# Altium PCB Breakout_board_v3.PcbDoc
Units mm, origin at the board's own origin, x right, y up, seen from the top; angles counter-clockwise.
Board outline 90.2 x 95.9 mm, 2 copper layers (Top Layer, Bottom Layer); 25 components, 88 nets, 209 pads, 79 vias.
Unrouted connection lines stored in the file: 5.
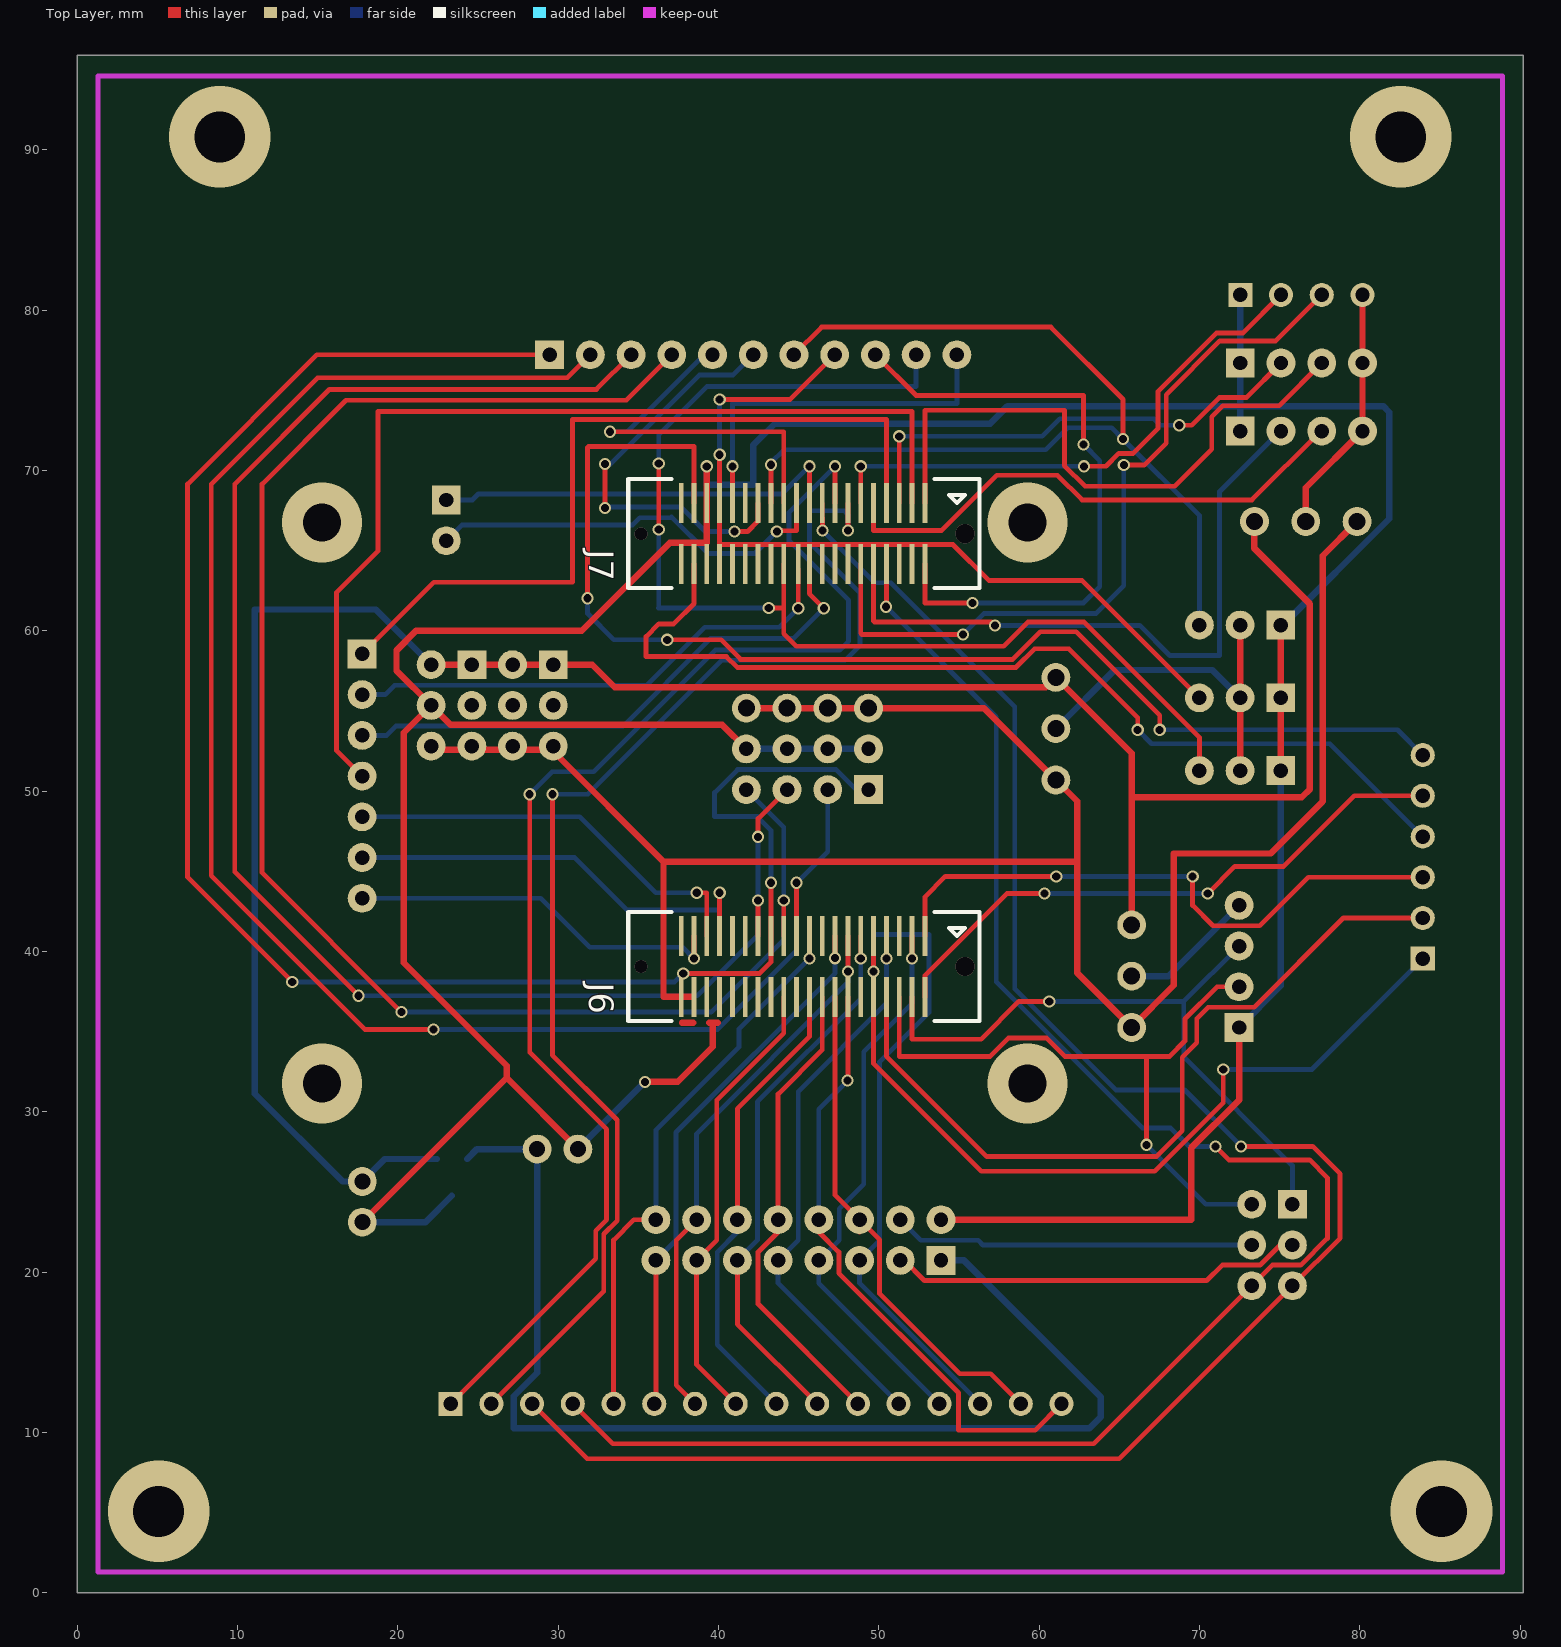
[diagram p0: Top Layer view]
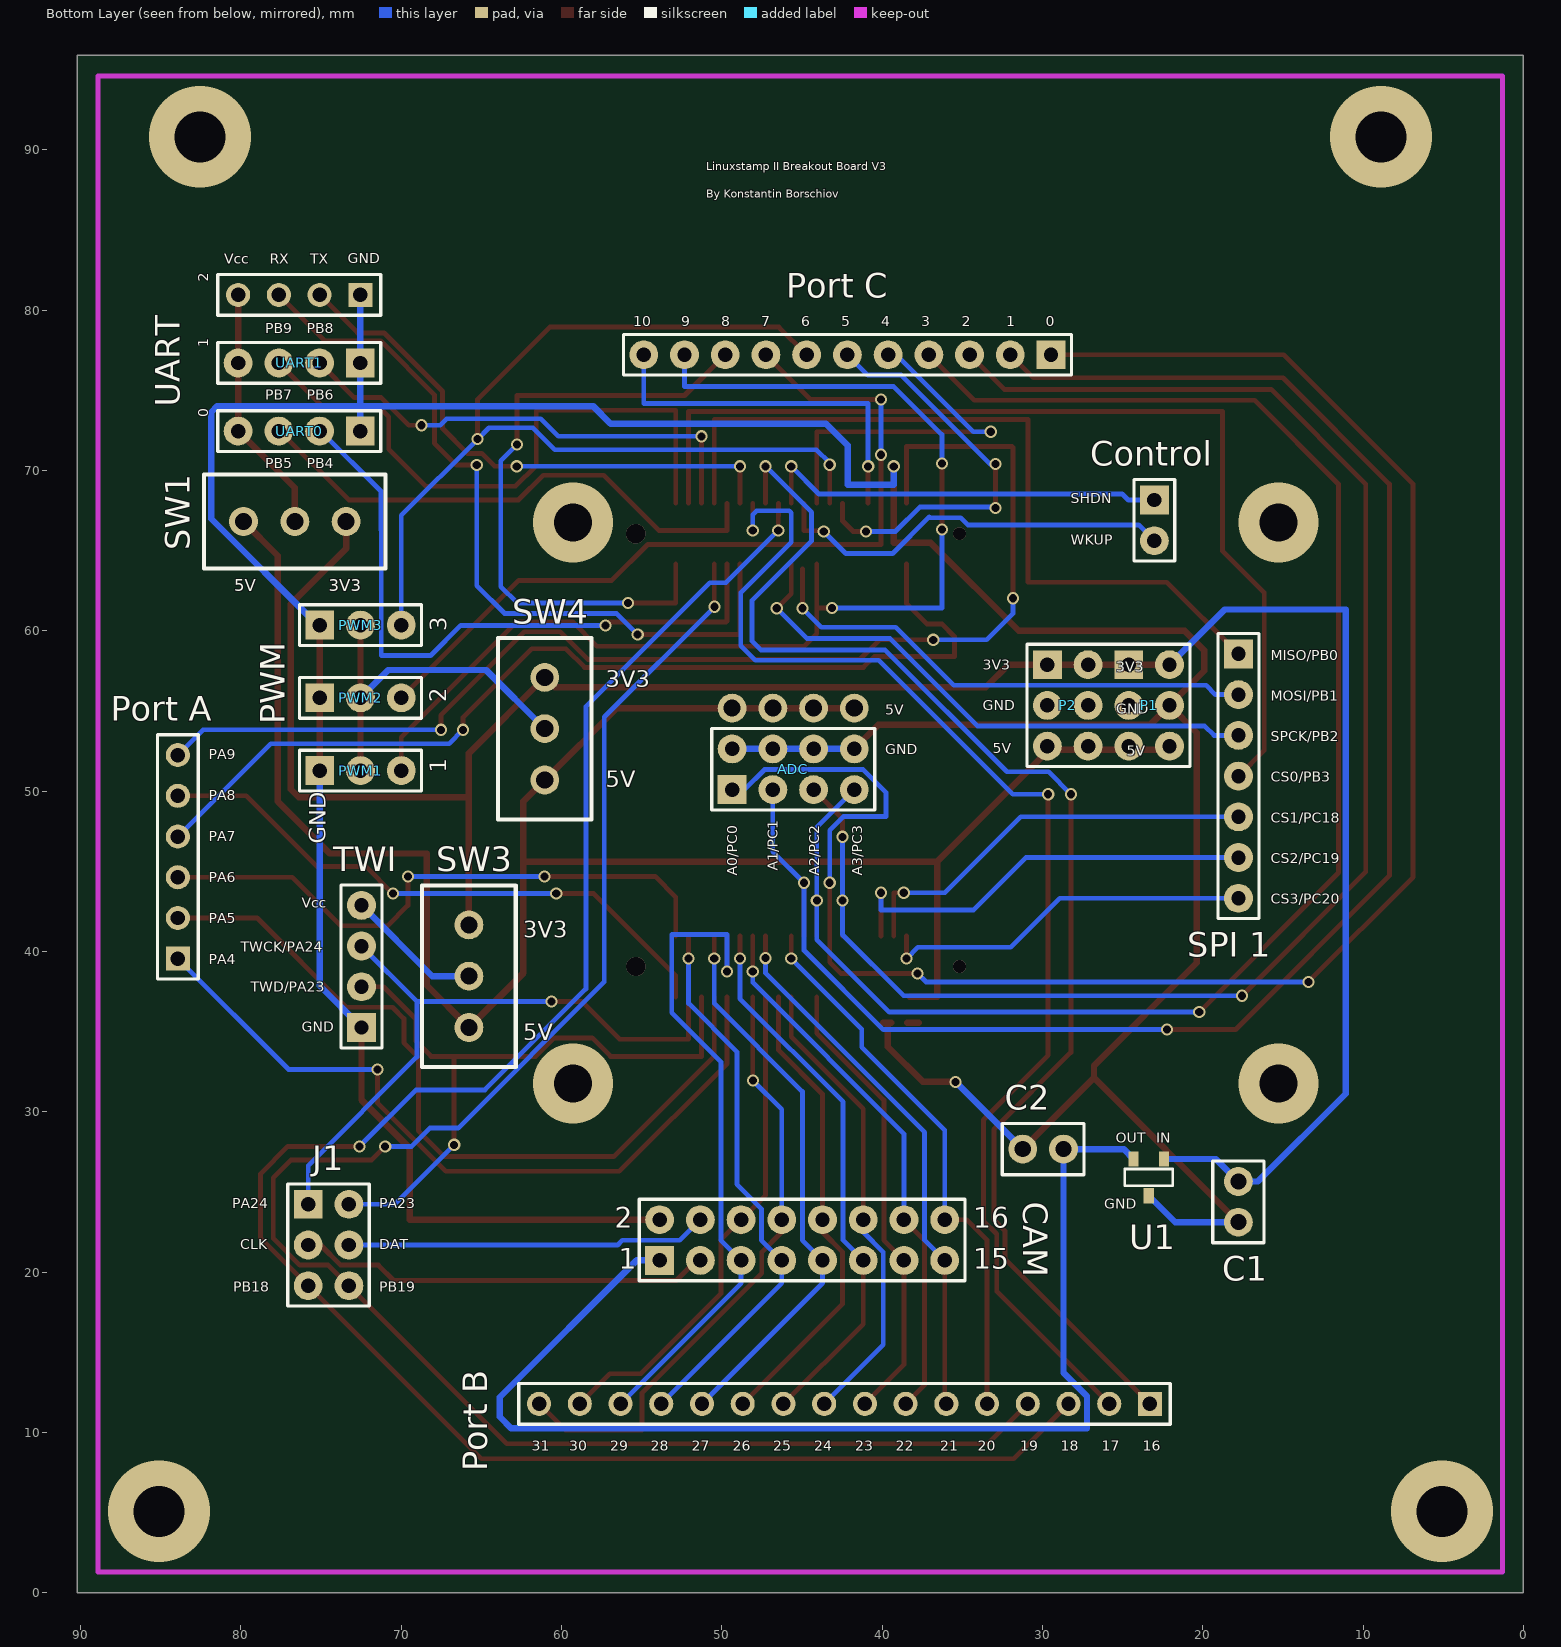
[diagram p1: Bottom Layer view, seen from below]

## Layer stack, top to bottom
Top Layer: signal copper 0.0356
Dielectric: dielectric 0.32, FR-4, Dk 4.8
Bottom Layer: signal copper 0.0356

## Board outline
0,0 90.2,0 90.2,95.9 0,95.9

## Design rules (kind name [scope] priority, off if disabled: settings)
Clearance [All] p1: gap=0.203
PolygonConnect [All] p1: connectstyle=Relief reliefconductorwidth=0.254 reliefentries=4 polygonreliefangle="90 Angle"
RoutingVias RoutingVias_1 [InNetClass('Rail')] p1: holewidth=3.18 width=6.35 viastyle="Through Hole" minholewidth=3.18 minwidth=6.35 maxholewidth=3.18 maxwidth=6.35
RoutingVias RoutingVias_2 [All] p2: holewidth=0.508 width=0.762 viastyle="Through Hole" minholewidth=0.508 minwidth=0.762 maxholewidth=1.27 maxwidth=1.27
RoutingVias [All] p3: holewidth=0.8 width=1.6 viastyle="Through Hole" minholewidth=0.711 minwidth=1.27 maxholewidth=0.711 maxwidth=1.27
SilkscreenOverComponentPads [All] p1: minsilkscreentomaskgap=0.25
SolderMaskExpansion [All] p1: expansion=0.102
Width Width_1 [InNetClass('Power')] p1: maxlimit=0.4 minlimit=0.4 preferedwidth=0.4 minimp=50.000000 maximp=50.000000 favimp=50.000000
Width [All] p2: maxlimit=0.3 minlimit=0.3 preferedwidth=0.3
27 further rules are at their usual default settings.

## Classes and differential pairs
net class Rail: Rail1 Rail2 Rail3 Rail4
net class Power: 1V 2V8 3V3 5V GND SW_OUT_1 SW_OUT_2 SW_OUT_3 SW_OUT_4

## Components (designator, comment, footprint, x,y, rotation, side; value= is the part's Value field where it differs from the comment)
2 "Header 4" HDR1X4#1 72.542,80.95 r0 bottom (schematic designator UART2)
ADC "Header 4X2" HDR2X4 49.353,50.094 r180 bottom
C1 "Cap" CAPR2.54-5.1x3.2 17.78,24.384 r90 bottom
C2 "Cap" CAPR2.54-5.1x3.2 29.956,27.674 r180 bottom
CAM "Header 8X2" HDR2X8 53.875,20.73 r180 bottom
Control "Header 2" HDR1X2 23.019,68.158 r270 bottom
J1 "Header 3X2" HDR2X3 75.794,24.232 r270 bottom
J6 "FCI connector" FCI_61082_041402LF#1 52.869,40.958 r270 top
J7 "FCI connector" FCI_61082_041402LF#2 52.869,67.958 r270 top
P1 "Header 3X2A" HDR2X3_CEN 24.613,57.887 r270 bottom
P2 "Header 3X2A" HDR2X3_CEN 29.693,57.887 r270 bottom
"Port A" "Header 6" HDR1X6 83.922,39.548 r90 bottom
"Port B" "Header 16" HDR1X16 23.292,11.786 r0 bottom
"Port C" "Header 11" HDR1X11 29.464,77.216 r0 bottom
PWM1 "Header 3" HDR1X3 75.069,51.283 r180 bottom
PWM2 "Header 3" HDR1X3 75.069,55.82 r180 bottom
PWM3 "Header 3" HDR1X3 75.069,60.358 r180 bottom
"SPI 1" "Header 7" HDR1X7 17.769,58.558 r270 bottom (schematic designator SPI_1)
SW1 "2 way switch" Tyco_SLS121PC04 79.826,66.816 r90 bottom
SW3 "2 way switch" Tyco_SLS121PC04 65.769,35.258 r0 bottom
SW4 "2 way switch" Tyco_SLS121PC04 61.037,50.694 r0 bottom
TWI "Header 4" HDR1X4#2 72.469,35.258 r90 bottom
U1 "Voltage Regulator - Linear, 2.8V output" PCBComponent_1 23.368,25.908 r0 bottom
UART0 "Header 4" HDR1X4#2 72.542,72.458 r0 bottom
UART1 "Header 4" HDR1X4#2 72.542,76.704 r0 bottom

## Footprints (in the part's own frame and the unit in brackets; to place one, negate y for a bottom-side part, rotate by r counter-clockwise, add the part's x,y. Pads: shape width x height; smd on the part's side, far side on the other; paste and mask are expansions set on the pad)
CAPR2.54-5.1x3.2 [mm] "Capacitor, Ceramic, Thru-Hole, Dipped Radial; Body 5.1 x 3.2 mm (WxT) Pin Spacing 2.54 mm (typ)"
  round 1.8 hole 1: 1(-1.27,0) 2(1.27,0)
  silkscreen extent -2.55,-1.6 2.55,1.6
FCI_61082_041402LF#1 [mm]
  rect 2.5x0.3 smd: 1(0,0) 2(0,-0.8) 3(0,-1.6) 4(0,-2.4) 5(0,-3.2) 6(0,-4) 7(0,-4.8) 8(0,-5.6) 9(0,-6.4) 10(0,-7.2) 11(0,-8) 12(0,-8.8) 13(0,-9.6) 14(0,-10.4) 15(0,-11.2) 16(0,-12) 17(0,-12.8) 18(0,-13.6) 19(0,-14.4) 20(0,-15.2) 21(3.8,0) 22(3.8,-0.8) 23(3.8,-1.6) 24(3.8,-2.4) 25(3.8,-3.2) 26(3.8,-4) 27(3.8,-4.8) 28(3.8,-5.6) 29(3.8,-6.4) 30(3.8,-7.2) 31(3.8,-8) 32(3.8,-8.8) 33(3.8,-9.6) 34(3.8,-10.4) 35(3.8,-11.2) 36(3.8,-12) 37(3.8,-12.8) 38(3.8,-13.6) 39(3.8,-14.4) 40(3.8,-15.2)
  silkscreen extent -1.5,-18.5 5.3,3.4, body extent -1.5,-18.5 5.3,3.3, height 3.65
FCI_61082_041402LF#2 [mm]
  rect 2.5x0.3 smd: 1(0,0) 2(0,-0.8) 3(0,-1.6) 4(0,-2.4) 5(0,-3.2) 6(0,-4) 7(0,-4.8) 8(0,-5.6) 9(0,-6.4) 10(0,-7.2) 11(0,-8) 12(0,-8.8) 13(0,-9.6) 14(0,-10.4) 15(0,-11.2) 16(0,-12) 17(0,-12.8) 18(0,-13.6) 19(0,-14.4) 20(0,-15.2) 21(3.8,0) 22(3.8,-0.8) 23(3.8,-1.6) 24(3.8,-2.4) 25(3.8,-3.2) 26(3.8,-4) 27(3.8,-4.8) 28(3.8,-5.6) 29(3.8,-6.4) 30(3.8,-7.2) 31(3.8,-7.9) 32(3.8,-8.8) 33(3.8,-9.6) 34(3.8,-10.4) 35(3.8,-11.2) 36(3.8,-12) 37(3.8,-12.8) 38(3.8,-13.6) 39(3.8,-14.4) 40(3.8,-15.2)
  silkscreen extent -1.5,-18.5 5.3,3.4, body extent -1.5,-18.5 5.3,3.3, height 3.65
HDR1X2 [mm] "Connector; Header; 2 Position"
  rect 1.8x1.8 hole 0.9: 1(0,0)
  round 1.8 hole 0.9: 2(2.54,0)
  silkscreen extent -1.27,-1.27 3.81,1.27
HDR1X3 [mm] "Connector; Header; 3 Position"
  rect 1.8x1.8 hole 0.9: 1(0,0)
  round 1.8 hole 0.9: 2(2.54,0) 3(5.08,0)
  silkscreen extent -1.27,-1.27 6.35,1.27
HDR1X4#1 [mm] "Connector; Header; 4 Position"
  rect 1.5x1.5 hole 0.9: 1(0,0)
  round 1.5 hole 0.9: 2(2.54,0) 3(5.08,0) 4(7.62,0)
  silkscreen extent -1.27,-1.27 8.89,1.27
HDR1X4#2 [mm] "Connector; Header; 4 Position"
  rect 1.8x1.8 hole 0.9: 1(0,0)
  round 1.8 hole 0.9: 2(2.54,0) 3(5.08,0) 4(7.62,0)
  silkscreen extent -1.27,-1.27 8.89,1.27
HDR1X6 [mm] "Connector; Header; 6 Position"
  rect 1.5x1.5 hole 0.9: 1(0,0)
  round 1.5 hole 0.9: 2(2.54,0) 3(5.08,0) 4(7.62,0) 5(10.16,0) 6(12.7,0)
  silkscreen extent -1.27,-1.27 13.97,1.27
HDR1X7 [mm] "Connector; Header; 7 Position"
  rect 1.8x1.8 hole 0.9: 1(0,0)
  round 1.8 hole 0.9: 2(2.54,0) 3(5.08,0) 4(7.62,0) 5(10.16,0) 6(12.7,0) 7(15.24,0)
  silkscreen extent -1.27,-1.27 16.51,1.27
HDR1X11 [mm] "Connector; Header; 11 Position"
  rect 1.8x1.8 hole 0.9: 1(0,0)
  round 1.8 hole 0.9: 2(2.54,0) 3(5.08,0) 4(7.62,0) 5(10.16,0) 6(12.7,0) 7(15.24,0) 8(17.78,0) 9(20.32,0) 10(22.86,0) 11(25.4,0)
  silkscreen extent -1.27,-1.27 26.67,1.27
HDR1X16 [mm] "Connector; Header; 16 Position"
  rect 1.5x1.5 hole 0.9: 1(0,0)
  round 1.5 hole 0.9: 2(2.54,0) 3(5.08,0) 4(7.62,0) 5(10.16,0) 6(12.7,0) 7(15.24,0) 8(17.78,0) 9(20.32,0) 10(22.86,0) 11(25.4,0) 12(27.94,0) 13(30.48,0) 14(33.02,0) 15(35.56,0) 16(38.1,0)
  silkscreen extent -1.27,-1.27 39.37,1.27
HDR2X3 [mm] "Connector; Header; 3x2 Position"
  rect 1.8x1.8 hole 0.9: 1(0,0)
  round 1.8 hole 0.9: 2(0,2.54) 3(2.54,0) 4(2.54,2.54) 5(5.08,0) 6(5.08,2.54)
  silkscreen extent -1.27,-1.27 6.35,3.81
HDR2X3_CEN [mm] "Connector; Header; 3x2 Position"
  rect 1.8x1.8 hole 0.9: 1(0,0)
  round 1.8 hole 0.9: 2(2.54,0) 3(5.08,0) 4(0,2.54) 5(2.54,2.54) 6(5.08,2.54)
  silkscreen extent -1.27,-1.27 6.35,3.81
HDR2X4 [mm] "Connector; Header; 4x2 Position"
  rect 1.8x1.8 hole 0.9: 1(0,0)
  round 1.8 hole 0.9: 2(0,2.54) 3(2.54,0) 4(2.54,2.54) 5(5.08,0) 6(5.08,2.54) 7(7.62,0) 8(7.62,2.54)
  silkscreen extent -1.27,-1.27 8.89,3.81
HDR2X8 [mm] "Connector; Header; 8x2 Position"
  rect 1.8x1.8 hole 0.9: 1(0,0)
  round 1.8 hole 0.9: 2(0,2.54) 3(2.54,0) 4(2.54,2.54) 5(5.08,0) 6(5.08,2.54) 7(7.62,0) 8(7.62,2.54) 9(10.16,0) 10(10.16,2.54) 11(12.7,0) 12(12.7,2.54) 13(15.24,0) 14(15.24,2.54) 15(17.78,0) 16(17.78,2.54)
  silkscreen extent -1.27,-1.27 19.05,3.81
PCBComponent_1 [mm]
  rect 0.65x0.95 smd: 0(-0.95,-1.15) 1(0.95,-1.15) 2(0,1.15)
  silkscreen extent -1.5,-0.52 1.5,0.52
Tyco_SLS121PC04 [mm]
  round 1.8 hole 1.067: 1(0,0) 2(0,-6.401) 3(0,-3.2)
  silkscreen extent -2.92,-8.86 2.92,2.46

## Part data
2 TWI UART0 UART1: "Header, 4-Pin"
ADC: "Header, 4-Pin, Dual row"
C1 C2: "Capacitor"
CAM: "Header, 8-Pin, Dual row"
Control: "Header, 2-Pin"
J1 P1 P2: "Header, 3-Pin, Dual row"
J6 J7: "40 pin Dual in line connector"
"Port A": "Header, 6-Pin"
"Port B": "Header, 16-Pin"
"Port C": "Header, 11-Pin"
PWM1 PWM2 PWM3: "Header, 3-Pin"
"SPI 1": "Header, 7-Pin"
SW1 SW3 SW4: library part Tyco_SLS121PC04

## Free pads (board coordinates)
  round 1.8 hole 1.067: 0(49.353,55.174) 1(46.813,55.174) 2(44.273,55.174) 3(41.733,55.174)

## Via types
v1: diameter 0.762, hole 0.508, Top Layer to Bottom Layer, 67 vias
v2: diameter 5, hole 2.375, Top Layer to Bottom Layer, 4 vias
v3: diameter 6.35, hole 3.18, Top Layer to Bottom Layer, 4 vias
v4: diameter 0.8, hole 0.8, Top Layer to Bottom Layer, 2 vias
v5: diameter 1.2, hole 1.2, Top Layer to Bottom Layer, 2 vias

## Nets (pads, with @x,y where several pads share a name; then routed paths per layer and width w, separated by ;. In a path a pad name is that pad's centre, name@x,y a point inside that pad or via, vN(x,y) a via of type N, cw(c..) or ccw(c..) an arc to the next point about the centre after c; other vN are vias at no path point)
1V: J7.37
2V8: C2.2 CAM.1 U1.1 | length 74.3
  Bottom Layer w0.4: U1.1 24.934,27.674 C2.2 28.686,13.731 27.219,12.263 27.219,10.251 63.129,10.251 63.85,10.973 63.85,12.192 55.312,20.73 CAM.1
3V3: C1.2 J7.34 J7.35 P1.1 P1.4 P2.1 P2.4 SW1.2 SW3.2 SW4.2 U1.0 | length 143.5
  Top Layer w0.4: P1.4 P1.1 27.432,57.887 29.972,57.887 32.119,57.887 33.528,56.477 60.419,56.477 SW4.2 65.769,52.363 65.769,49.609 ; SW3.2 65.769,49.609 ; SW1.2 73.426,65.131 76.886,61.671 76.886,50.114 76.381,49.609 65.769,49.609
  Bottom Layer w0.4: P1.4 18.628,61.331 11.081,61.331 11.081,31.134 16.561,25.654 C1.2 19.184,27.058 U1.0
5V: J6.39 J6.40 P1.3 P1.6 P2.3 P2.6 pad.0 pad.1 pad.2 pad.3 SW1.1 SW3.1 SW4.1 | length 133.9
  Top Layer w0.4: P1.6@21.669,52.578 29.593,52.578 36.569,45.602 ; 37.719,35.558 38.419,35.558 ; 38.269,37.183 36.569,37.183 36.569,45.602 ; pad.3 pad.2 pad.1 pad.0 56.557,55.174 SW4.1 62.369,49.362 62.369,45.602 ; SW1.1 77.694,64.684 77.694,49.358 74.444,46.108 68.394,46.108 68.394,37.883 SW3.1 62.369,38.658 62.369,45.602 ; 36.569,45.602 62.369,45.602
CAM_CK: CAM.3 J1.3 | length 25.9
  Top Layer w0.3: CAM.3 51.576,20.73 52.829,19.477 70.455,19.477 71.416,20.438 73.773,20.438 75.026,21.692 J1.3
CAM_DT: CAM.4 J1.4 | length 22.6
  Bottom Layer w0.3: CAM.4 52.622,21.983 56.198,21.983 56.49,21.692 J1.4
CMD: J7.40
DAT0: J6.26
DAT1: "Port A.2" J6.24 | length 49.5
  Top Layer w0.3: J6.24 50.469,33.478 56.741,27.206 67.308,27.206 68.919,28.817 68.919,33.396 69.825,34.302 69.825,35.814 70.536,36.525 73.406,36.525 78.969,42.088 83.922,42.088
DAT2: "Port A.1" J6.25 | length 47.9
  Top Layer w0.3: J6.25 49.669,33.008 56.388,26.289 67.208,26.289 71.476,30.556 v1(71.476,32.639)
  Bottom Layer w0.3: v1(71.476,32.639) 77.013,32.639 83.922,39.548
DAT3: J7.20
DDM: J7.27
DDP: J7.28
GND: 2.1 ADC.2 ADC.4 ADC.6 ADC.8 C1.1 C2.1 CAM.2 J6.37 J6.38 J7.18 P1.2 P1.5 P2.2 P2.5 PWM1.1 PWM2.1 PWM3.1 TWI.1 U1.2 UART0.1 UART1.1 | length 251.6
  Top Layer w0.4: C1.1 26.783,32.117 ; C2.1 26.783,32.117 ; v1(35.419,31.867) 37.453,31.867 39.644,34.058 39.644,35.544 ; v1(39.269,70.258) J7.18 39.269,65.481 36.957,65.481 31.471,59.995 21.133,59.995 19.914,58.776 19.914,57.506 P1.5 ; 39.419,35.558 39.644,35.558 39.944,35.558 ; ADC.8 40.24,54.127 23.292,54.127 P1.5 ; CAM.2 69.472,23.27 69.472,27.737 72.469,30.734 TWI.1 ; PWM1.1 PWM2.1 PWM3.1 ; P1.5 20.366,53.64 20.366,39.286 26.783,32.869 26.783,32.117
  Bottom Layer w0.4: C1.1 21.724,23.114 U1.2 ; C2.1 v1(35.419,31.867) ; v1(39.269,70.258) 39.269,69.114 42.153,69.114 42.153,71.577 43.499,72.923 56.934,72.923 58.027,74.016 72.542,74.016 ; ADC.8 ADC.6 ADC.4 ADC.2 ; TWI.1 75.069,37.858 PWM1.1 ; UART0.1 72.542,74.016 ; 2.1 UART1.1 72.542,74.016 ; PWM3.1 75.211,60.358 81.839,66.985 81.839,73.635 81.458,74.016 72.542,74.016
HDMB: J7.22
HDPB: J7.23
PA2: J6.3
PA6: "Port A.3" J6.1 | length 37.6
  Top Layer w0.3: J6.1 52.869,43.395 54.153,44.679 v1(61.062,44.679) ; v1(69.571,44.679) 69.571,42.875 70.841,41.605 73.762,41.605 76.784,44.628 83.922,44.628
  Bottom Layer w0.3: v1(61.062,44.679) v1(69.571,44.679)
PA7: "Port A.4" J7.39 | length 62
  Top Layer w0.3: J7.39 38.469,61.685 37.211,60.427 36.271,60.427 35.484,59.639 35.484,58.395 40.487,58.395 41.168,57.714 58.552,57.714 59.716,58.877 61.849,58.877 66.142,54.585 v1(66.142,53.823)
  Bottom Layer w0.3: v1(66.142,53.823) 67.005,52.959 78.13,52.959 83.922,47.168
PA9: "Port A.6" J7.19 | length 78.3
  Top Layer w0.3: v1(31.826,62.027) 31.826,71.423 31.89,71.488 38.469,71.488 J7.19 ; v1(36.805,59.436) 40.157,59.436 41.377,58.217 58.344,58.217 60.071,59.944 62.306,59.944 67.513,54.737 v1(67.513,53.823)
  Bottom Layer w0.3: v1(31.826,62.027) 31.826,61.087 33.477,59.436 v1(36.805,59.436) ; v1(67.513,53.823) 82.347,53.823 83.922,52.248
PA23: J1.2 J6.23 TWI.2 | length 42.1
  Top Layer w0.3: J6.23 51.269,33.458 56.934,33.458 58.087,34.611 60.451,34.611 61.604,33.458 68.129,33.458 69.088,34.417 69.088,35.789 71.097,37.798 TWI.2 ; v1(66.69,27.94) 66.69,33.448
  Bottom Layer w0.3: v1(66.69,27.94) 70.398,24.232 J1.2
PA24: J1.1 J6.22 TWI.3 | length 40.9
  Top Layer w0.3: J6.22 52.069,34.525 56.375,34.525 58.733,36.883 v1(60.625,36.883)
  Bottom Layer w0.3: v1(60.625,36.883) 69.014,36.883 ; TWI.3 69.014,36.883 ; J1.1 75.794,26.647 69.014,33.426 69.014,36.883
PB0: "SPI 1.1" J7.4 | length 49.9
  Top Layer w0.3: 17.769,58.558 22.244,63.033 30.894,63.033 30.894,73.177 50.469,73.177 J7.4
PB1: "SPI 1.2" J7.31 | length 31.9
  Top Layer w0.3: v1(44.969,61.408) J7.31@44.969,63.858
  Bottom Layer w0.3: 17.769,56.018 19.21,56.018 19.792,56.6 35.518,56.6 39.141,60.223 43.784,60.223 v1(44.969,61.408)
PB2: "SPI 1.3" J7.30 | length 35.2
  Top Layer w0.3: J7.30 45.669,62.308 v1(46.569,61.408)
  Bottom Layer w0.3: 17.769,53.478 19.295,53.478 19.877,54.06 34.045,54.06 39.497,59.512 44.673,59.512 v1(46.569,61.408)
PB3: "SPI 1.4" J7.2 | length 64.1
  Top Layer w0.3: 17.194,50.938 17.769,50.938 16.169,52.538 16.169,62.383 18.769,64.983 18.769,73.684 52.069,73.684 J7.2
PB4: J7.25 UART0.2 | length 41.6
  Top Layer w0.3: J7.25 49.669,60.604 49.72,60.554 57.023,60.554 v1(57.252,60.325)
  Bottom Layer w0.3: v1(57.252,60.325) 66.254,60.325 ; 66.266,60.336 68.144,58.458 71.242,58.458 71.242,66.282 71.25,66.289 71.25,68.689 UART0.2@75.019,72.458
PB5: J7.5 UART0.3 | length 33.4
  Top Layer w0.3: J7.5 49.669,66.258 53.919,66.258 57.362,69.701 61.138,69.701 62.676,68.163 73.264,68.163 UART0.3@77.559,72.458
PB6: J7.3 UART1.2 | length 30.4
  Top Layer w0.3: J7.3 v1(51.269,72.129) v1@51.269,72.358 ; v1(68.732,72.822) 69.519,72.822 71.242,74.544 72.923,74.544 UART1.2
  Bottom Layer w0.3: v1(51.269,72.129) 60.191,72.129 61.29,73.228 67.158,73.228 67.564,72.822 v1(68.732,72.822)
PB7: J7.1 UART1.3 | length 38.9
  Top Layer w0.3: J7.1 52.869,73.758 61.569,73.758 61.569,70.308 62.865,69.012 68.453,69.012 70.764,71.323 70.764,73.355 71.45,74.041 74.96,74.041 UART1.3
PB8: 2.2 J7.6 | length 34.3
  Top Layer w0.3: J7.6 v1(48.869,70.258) ; v1(62.789,70.258) 64.165,70.258 64.974,71.067 65.86,71.067 67.416,72.623 67.416,74.935 71.064,78.583 72.715,78.583 2.2
  Bottom Layer w0.3: v1(48.869,70.258) v1(62.789,70.258)
PB9: 2.3 J7.26 | length 48
  Top Layer w0.3: J7.26 48.869,59.843 48.946,59.766 v1(55.245,59.766) ; v1(65.278,70.333) 66.548,70.333 67.92,71.704 67.92,74.727 71.272,78.08 74.752,78.08 2.3
  Bottom Layer w0.3: v1(55.245,59.766) 56.566,61.087 63.551,61.087 65.278,62.814 v1(65.278,70.333)
PB10: J6.9
PB11: J6.33
PB12: J6.34
PB13: J6.31
PB16: "Port B.1" J7.8 | length 83.8
  Top Layer w0.3: 23.292,11.786 32.339,20.833 32.339,22.586 33.02,23.267 33.02,28.905 28.219,33.706 v1(28.219,49.809) ; J7.8 v1(47.269,70.258)
  Bottom Layer w0.3: v1(28.219,49.809) 29.616,51.206 32.207,51.206 39.802,58.801 47.549,58.801 48.108,59.36 48.108,61.9 44.399,65.608 44.399,67.388 v1(47.269,70.258)
PB17: "Port B.2" J7.7 | length 80.8
  Top Layer w0.3: 25.832,11.786 32.842,18.796 32.842,22.377 33.68,23.216 33.68,29.489 29.642,33.528 v1(29.642,49.809) ; v1(48.069,66.258) J7.7
  Bottom Layer w0.3: v1(29.642,49.809) 31.852,49.809 40.208,58.166 47.904,58.166 48.819,59.08 48.819,62.382 45.669,65.532 45.669,67.361 45.796,67.488 47.828,67.488 48.069,67.247 v1(48.069,66.258)
PB18: "Port B.3" J1.5 J7.9 | length 122.6
  Top Layer w0.3: 28.372,11.786 31.801,8.357 64.999,8.357 J1.5 78.765,22.123 78.765,26.137 77.064,27.838 v1(72.593,27.838) ; J7.9 v1(46.477,66.258) v1@46.477,66.378
  Bottom Layer w0.3: v1(46.477,66.258) 49.739,62.996 50.754,62.996 58.475,55.275 58.475,37.664 64.77,31.369 69.063,31.369 v1(72.593,27.838)
PB19: "Port B.4" J1.6 J7.24 | length 111.8
  Top Layer w0.3: 30.912,11.786 33.401,9.296 63.398,9.296 J1.6 74.54,20.438 76.313,20.438 77.978,22.104 77.978,25.883 76.86,27 71.831,27 v1(70.993,27.838) ; v1@50.469,61.5 J7.24
  Bottom Layer w0.3: v1(50.45,61.5) 57.325,54.625 57.325,38.102 66.446,28.981 68.199,28.981 69.342,27.838 v1(70.993,27.838)
PB20: "Port B.5" CAM.16 J6.10 | length 35
  Top Layer w0.3: 33.452,11.786 33.452,21.996 34.725,23.27 CAM.16 ; v1(45.669,39.558) J6.10
  Bottom Layer w0.3: CAM.16 36.095,28.859 41.269,34.033 41.269,35.158 v1(45.669,39.558)
PB21: "Port B.6" CAM.15 J6.8 | length 33.8
  Top Layer w0.3: 35.992,11.786 36.095,11.889 CAM.15 ; v1(47.269,39.583) J6.8
  Bottom Layer w0.3: CAM.15 37.348,21.983 37.348,28.724 47.269,38.645 v1(47.269,39.583)
PB22: "Port B.7" CAM.14 J6.7 | length 34.1
  Top Layer w0.3: 38.532,11.786 37.363,12.954 37.363,21.998 CAM.14 ; v1(48.069,38.758) J6.7
  Bottom Layer w0.3: CAM.14 38.635,28.633 48.069,38.067 v1(48.069,38.758)
PB23: "Port B.8" CAM.13 J6.32 | length 28.6
  Top Layer w0.3: 41.072,11.786 38.635,14.222 CAM.13 39.888,21.983 39.888,30.727 44.069,34.908 J6.32
PB24: "Port B.9" CAM.12 J6.30 | length 29.3
  Top Layer w0.3: CAM.12 41.175,30.189 45.669,34.683 J6.30
  Bottom Layer w0.3: CAM.12 41.175,22.502 39.922,21.249 39.922,15.476 43.612,11.786
PB25: "Port B.10" CAM.11 J6.6 | length 34.4
  Top Layer w0.3: CAM.11 41.175,16.762 46.152,11.786 ; v1(48.869,39.558) J6.6
  Bottom Layer w0.3: CAM.11 42.428,21.983 42.428,30.617 48.869,37.058 v1(48.869,39.558)
PB26: "Port B.11" CAM.10 J6.29 | length 29.6
  Top Layer w0.3: J6.29 46.469,33.858 43.715,31.104 CAM.10 43.715,22.502 42.462,21.249 42.462,18.016 48.692,11.786
PB27: "Port B.12" CAM.9 J6.4 | length 35.1
  Top Layer w0.3: v1(50.469,39.558) J6.4
  Bottom Layer w0.3: v1(50.469,39.558) 50.469,36.758 44.968,31.257 44.968,21.983 CAM.9 43.715,19.302 51.232,11.786
PB28: "Port B.13" CAM.7 J6.2 | length 34.7
  Top Layer w0.3: v1(52.069,39.558) J6.2
  Bottom Layer w0.3: v1(52.069,39.558) 52.069,36.758 49.056,33.744 49.056,25.481 47.525,23.95 47.525,22 CAM.7 46.255,19.302 53.772,11.786
PB29: "Port B.14" CAM.5 J6.5 | length 42.7
  Top Layer w0.3: CAM.5@48.795,20.22 CAM.5 ; v1(49.669,38.758) J6.5
  Bottom Layer w0.3: v1(49.669,38.758) 49.669,41.063 53.124,41.063 53.124,36.188 50.048,33.112 50.048,21.983 CAM.5 48.795,19.302 56.312,11.786
PB30: "Port B.15" CAM.6 J6.28 | length 32.1
  Top Layer w0.3: J6.28 47.269,24.796 CAM.6 ; CAM.6@48.795,22.502 CAM.6 ; 58.852,11.786 56.972,13.665 55.042,13.665 50.048,18.659 50.048,22.017 CAM.6
PB31: "Port B.16" CAM.8 J6.27 | length 38.5
  Top Layer w0.3: CAM.8 46.255,22.502 47.508,21.249 47.508,19.929 54.966,12.471 54.966,10.135 59.741,10.135 61.392,11.786 ; v1@48.069,31.95 J6.27
  Bottom Layer w0.3: CAM.8 46.255,30.155 v1(48.05,31.95)
PC0: "Port C.1" ADC.1 J6.13 | length 114.5
  Top Layer w0.3: v1(13.411,38.1) 6.883,44.628 6.883,69.151 14.948,77.216 29.464,77.216 ; v1@37.694,38.633 v1(37.795,38.633) 42.57,38.633 43.269,39.332 J6.13 v1(43.269,44.283)
  Bottom Layer w0.3: v1(13.411,38.1) 37.262,38.1 v1(37.795,38.633) ; v1(43.269,44.283) 43.269,47.566 42.422,48.412 39.751,48.412 39.751,49.911 41.187,51.347 47.332,51.347 48.585,50.094 ADC.1
PC1: "Port C.2" ADC.3 J6.11 | length 107.9
  Top Layer w0.3: v1(22.225,35.128) 17.958,35.128 8.357,44.729 8.357,69.151 14.994,75.789 30.577,75.789 32.004,77.216 ; J6.11 v1(44.869,44.283)
  Bottom Layer w0.3: v1(22.225,35.128) 39.929,35.128 44.869,40.068 v1(44.869,44.283) 46.813,46.227 ADC.3@46.813,49.911
PC2: "Port C.3" ADC.5 J6.14 | length 101.7
  Top Layer w0.3: v1(17.551,37.236) 9.83,44.958 9.83,69.151 15.735,75.057 32.385,75.057 34.544,77.216 ; J6.14 v1(42.469,43.183) ; v1(42.469,47.15) 42.469,48.29 ADC.5
  Bottom Layer w0.3: v1(17.551,37.236) 38.659,37.236 42.469,41.046 v1(42.469,43.183) v1(42.469,47.15)
PC3: "Port C.4" ADC.7 J6.12 | length 103.7
  Top Layer w0.3: v1(20.218,36.22) 11.532,44.907 11.532,69.151 16.764,74.384 34.252,74.384 37.084,77.216 ; J6.12 v1(44.069,43.183)
  Bottom Layer w0.3: v1(20.218,36.22) 39.548,36.22 44.069,40.742 v1(44.069,43.183) 44.069,47.758 ADC.7
PC4: "Port C.5" J7.12 | length 23.7
  Top Layer w0.3: v1(33.223,72.415) 44.069,72.415 J7.12
  Bottom Layer w0.3: v1(33.223,72.415) 34.315,72.415 39.116,77.216 39.624,77.216
PC5: "Port C.6" J7.14 | length 26.4
  Top Layer w0.3: v1(32.918,67.666) v1(32.918,70.409) ; v1(40.996,66.192) 41.808,66.192 42.469,66.853 J7.14
  Bottom Layer w0.3: v1(32.918,67.666) 32.982,67.729 37.63,67.729 39.167,66.192 v1(40.996,66.192) ; v1(32.918,70.409) 33.274,70.409 38.811,75.946 40.894,75.946 42.164,77.216
PC6: "Port C.7" J7.13 PWM3.3 | length 64.8
  Top Layer w0.3: J7.13 v1(43.269,70.358) ; 44.704,77.216 46.431,78.943 60.731,78.943 65.227,74.447 v1(65.227,71.958)
  Bottom Layer w0.3: v1(43.269,70.358) 43.269,70.472 44.094,71.297 60.406,71.297 61.779,72.669 64.516,72.669 v1(65.227,71.958) 69.989,67.196 PWM3.3
PC7: "Port C.8" J7.17 PWM2.3 | length 51.3
  Top Layer w0.3: v1(40.069,70.98) J7.17 40.069,65.383 54.619,65.383 56.858,63.144 62.665,63.144 PWM2.3 ; v1(40.069,74.422) 44.45,74.422 47.244,77.216
  Bottom Layer w0.3: v1(40.069,70.98) v1(40.069,74.422)
PC8: "Port C.9" J7.21 | length 40.1
  Top Layer w0.3: 49.784,77.216 52.324,74.676 62.763,74.676 v1(62.763,71.628) ; J7.21 52.869,61.736 v1(55.841,61.736)
  Bottom Layer w0.3: v1(55.841,61.736) 62.763,61.736 63.779,62.752 63.779,70.612 v1(62.763,71.628)
PC9: "Port C.10" J7.32 PWM1.3 | length 74.1
  Top Layer w0.3: v1(36.271,66.319) v1(36.271,70.434) ; v1(43.129,61.417) 44.044,61.417 ; J7.32 44.069,59.82 44.858,59.031 44.859,59.032 57.785,59.032 59.307,60.554 62.789,60.554 69.989,53.353 PWM1.3
  Bottom Layer w0.3: 36.246,61.417 v1(43.129,61.417) ; 36.271,61.443 v1(36.271,66.319) ; v1(36.271,70.434) 36.271,72.238 39.268,75.235 52.324,75.235 52.324,77.216
PC10: "Port C.11" J7.16 | length 23.3
  Top Layer w0.3: J7.16 v1(40.869,70.258)
  Bottom Layer w0.3: v1(40.869,70.258) 40.869,74.168 54.864,74.168 54.864,77.216
PC11: J7.15
PC12: J7.29
PC15: J6.20
PC16: J6.16
PC17: J6.36
PC18: "SPI 1.5" J6.18 | length 26.2
  Top Layer w0.3: v1(38.644,43.658) 39.269,43.658 J6.18
  Bottom Layer w0.3: 17.769,48.398 31.341,48.398 36.081,43.658 v1(38.644,43.658)
PC19: "SPI 1.6" J6.17 | length 27.4
  Top Layer w0.3: J6.17 v1(40.069,43.658)
  Bottom Layer w0.3: 17.769,45.858 31.025,45.858 34.3,42.583 40.069,42.583 v1(40.069,43.658)
PC20: "SPI 1.7" J6.19 | length 23.7
  Top Layer w0.3: v1(38.469,39.558) J6.19
  Bottom Layer w0.3: 17.769,43.318 28.909,43.318 31.969,40.258 37.769,40.258 v1(38.469,39.558)
PC21: J6.35
PC22: J6.15
Rail1: 
Rail2: 
Rail3: 
Rail4: 
RST: J7.36
RX4: J7.38
SD-CLK: "Port A.5" J6.21 | length 37
  Top Layer w0.3: J6.21 52.869,38.493 57.988,43.612 v1(60.325,43.612) ; v1(70.51,43.612) 72.2,45.301 75.248,45.301 79.654,49.708 83.922,49.708
  Bottom Layer w0.3: v1(60.325,43.612) v1(70.51,43.612)
SHDN: Control.1 J7.10 | length 26.2
  Top Layer w0.3: J7.10 v1(45.669,70.258)
  Bottom Layer w0.3: Control.1@23.273,68.412 Control.1 24.648,68.158 25.022,68.532 43.943,68.532 v1(45.669,70.258)
SW_OUT_1: 2.4 SW1.3 UART0.4 UART1.4 | length 15.6
  Top Layer w0.4: SW1.3 76.626,68.922 UART0.4 UART1.4 2.4
SW_OUT_2: 
SW_OUT_3: SW3.3 TWI.4 | length 8.5
  Bottom Layer w0.4: SW3.3 68.049,38.458 TWI.4
SW_OUT_4: PWM1.2 PWM2.2 PWM3.2 SW4.3 | length 22.8
  Top Layer w0.4: PWM1.2 PWM2.2 PWM3.2
  Bottom Layer w0.4: SW4.3 64.699,57.556 70.793,57.556 PWM2.2
TX4: J7.33
WKUP: Control.2 J7.11 | length 25.6
  Top Layer w0.3: v1@43.637,66.243 44.854,66.243 44.869,66.258 J7.11
  Bottom Layer w0.3: Control.2 24.001,66.6 34.646,66.6 35.099,67.054 37.002,67.054 ; 37.057,67.108 39.345,64.821 42.266,64.821 v1(43.637,66.192)
XCLK: 
copper on no net:
  other v2: 15.269,31.758 59.269,31.758 15.269,66.758 59.269,66.758
  other v3: 5.08,5.08 85.09,5.08 8.89,90.81 82.55,90.81
  other v4: 35.169,39.058 35.169,66.058
  other v5: 55.369,39.058 55.369,66.058

## Keep-outs
Keep-Out Layer:
  lines w0.3: 1.3,1.3 1.3,94.6 88.9,94.6 88.9,1.3 1.3,1.3

## Silkscreen, mask and mechanical layers (free items; w line width, h text height)
Bottom Overlay:
  text "Linuxstamp II Breakout Board V3" at 50.978,88.722 h0.51
  text "By Konstantin Borschiov" at 50.978,86.995 h0.51
  text "GND" at 73.331,82.933 h0.64
  text "TX" at 75.657,82.908 h0.64
  text "RX" at 78.182,82.908 h0.64
  text "Vcc" at 81.033,82.908 h0.64
  text "0" at 29.794,78.994 h0.64
  text "1" at 32.251,78.994 h0.64
  text "2" at 35.046,78.994 h0.64
  text "3" at 37.545,78.994 h0.64
  text "4" at 40.044,78.994 h0.64
  text "5" at 42.543,78.994 h0.64
  text "6" at 45.042,78.994 h0.64
  text "7" at 47.541,78.994 h0.64
  text "8" at 50.04,78.994 h0.64
  text "9" at 52.539,78.994 h0.64
  text "10" at 55.524,78.994 h0.64
  text "PB8" at 75.895,78.562 h0.64
  text "PB9" at 78.461,78.562 h0.64
  text "1" at 82.042,77.699 h0.64 r270
  text "PB6" at 75.895,74.397 h0.64
  text "PB7" at 78.461,74.397 h0.64
  text "UART" at 83.82,73.965 h1.52 r270
  text "0" at 82.042,73.33 h0.64 r270
  text "PB4" at 75.895,70.129 h0.64
  text "PB5" at 78.461,70.129 h0.64
  text "SHDN" at 28.219,67.945 h0.64
  text "WKUP" at 28.219,65.38 h0.64
  text "3V3" at 74.524,62.459 h0.76
  text "5V" at 80.391,62.459 h0.76
  text "3" at 67.144,59.958 h1.02 r270
  text "MISO/PB0" at 15.773,58.166 h0.64
  text "3V3" at 33.731,57.556 h0.64
  text "3V3" at 25.388,57.437 h0.64
  text "3V3" at 57.226,56.49 h1.02
  text "MOSI/PB1" at 15.773,55.634 h0.64
  text "2" at 67.194,55.558 h1.02 r270
  text "GND" at 33.731,55.042 h0.64
  text "GND" at 25.388,54.837 h0.64
  text "5V" at 39.79,54.762 h0.64
  text "PWM" at 77.244,54.158 h1.52 r270
  text "SPCK/PB2" at 15.773,53.103 h0.64
  text "5V" at 33.096,52.349 h0.64
  text "GND" at 39.79,52.313 h0.64
  text "5V" at 24.753,52.21 h0.64
  text "PA9" at 81.991,51.994 h0.64
  text "1" at 67.194,51.158 h1.02 r270
  text "CS0/PB3" at 15.773,50.571 h0.64
  text "5V" at 57.226,50.241 h1.02
  text "PA8" at 81.991,49.439 h0.64
  text "CS1/PC18" at 15.773,48.04 h0.64
  text "PA7" at 81.991,46.883 h0.64
  text "GND" at 74.694,46.733 h1.02 r270
  text "CS2/PC19" at 15.773,45.508 h0.64
  text "A1/PC1" at 46.507,45.047 h0.64 r270
  text "A3/PC3" at 41.224,44.729 h0.64 r270
  text "A2/PC2" at 43.917,44.729 h0.64 r270
  text "A0/PC0" at 49.047,44.729 h0.64 r270
  text "PA6" at 81.991,44.328 h0.64
  text "CS3/PC20" at 15.773,42.977 h0.64
  text "Vcc" at 76.201,42.733 h0.64
  text "PA5" at 81.991,41.773 h0.64
  text "3V3" at 62.369,40.858 h1.02
  text "TWCK/PA24" at 80.01,39.98 h0.64
  text "PA4" at 81.991,39.218 h0.64
  text "TWD/PA23" at 79.375,37.49 h0.64
  text "GND" at 76.201,34.983 h0.64
  text "5V" at 62.369,34.458 h1.02
  text "PA23" at 71.349,23.978 h0.64
  text "PA24" at 80.543,23.978 h0.64
  text "DAT" at 71.349,21.412 h0.64
  text "CLK" at 80.035,21.412 h0.64
  text "PB19" at 71.349,18.771 h0.64
  text "PB18" at 80.459,18.771 h0.64
  text "16" at 23.749,8.865 h0.64
  text "17" at 26.296,8.865 h0.64
  text "18" at 28.843,8.865 h0.64
  text "19" at 31.39,8.865 h0.64
  text "20" at 34.043,8.865 h0.64
  text "21" at 36.378,8.865 h0.64
  text "22" at 39.137,8.865 h0.64
  text "23" at 41.684,8.865 h0.64
  text "24" at 44.231,8.865 h0.64
  text "25" at 46.778,8.865 h0.64
  text "26" at 49.325,8.865 h0.64
  text "27" at 51.872,8.865 h0.64
  text "28" at 54.419,8.865 h0.64
  text "29" at 56.966,8.865 h0.64
  text "30" at 59.514,8.865 h0.64
  text "31" at 61.849,8.865 h0.64
Mechanical 1:
  lines w0.025: 0,0 0,95.885 90.195,95.885 90.195,0 0,0
Drill Drawing:
  text ".LEGEND" at 95.28,5.08 h1.52
  text "Drill Drawing." at 95.28,2.54 h1.52

## Dimensions
1.3,1.3 to 1.3,94.6 on Mechanical 1
1.3,1.3 to 88.9,1.3 on Mechanical 1

## Text inside footprints (layer, text, board x,y; h text height)
CAM: Bottom Overlay "16" at 34.317,22.762 h1.27; Bottom Overlay "15" at 34.317,20.222 h1.27; Bottom Overlay "1" at 56.415,20.222 h1.27; Bottom Overlay "2" at 56.669,22.762 h1.27
U1: Bottom Overlay "GND" at 26.137,23.952 h0.64; Bottom Overlay "OUT" at 25.425,28.067 h0.64; Bottom Overlay "IN" at 22.885,28.067 h0.64